# EAGLE board PCB Telemetria 2020 (EAGLE 9.6.2)
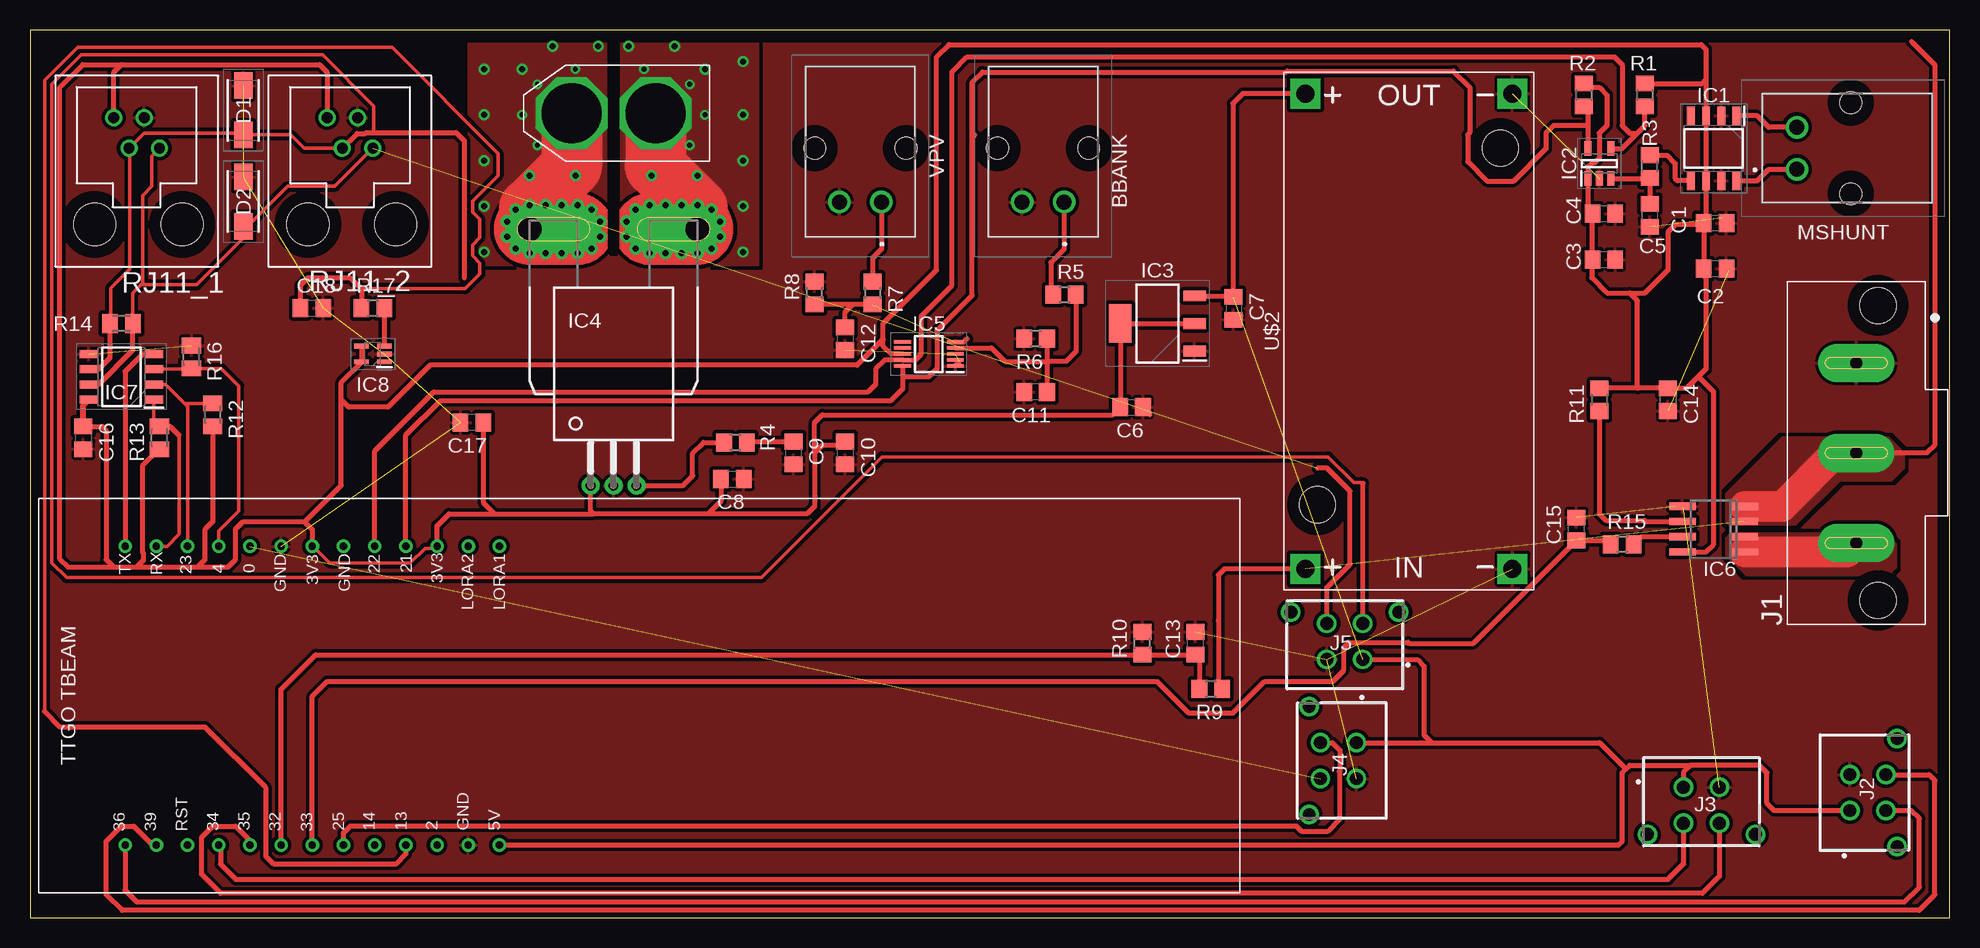
[diagram p0: board, top side]
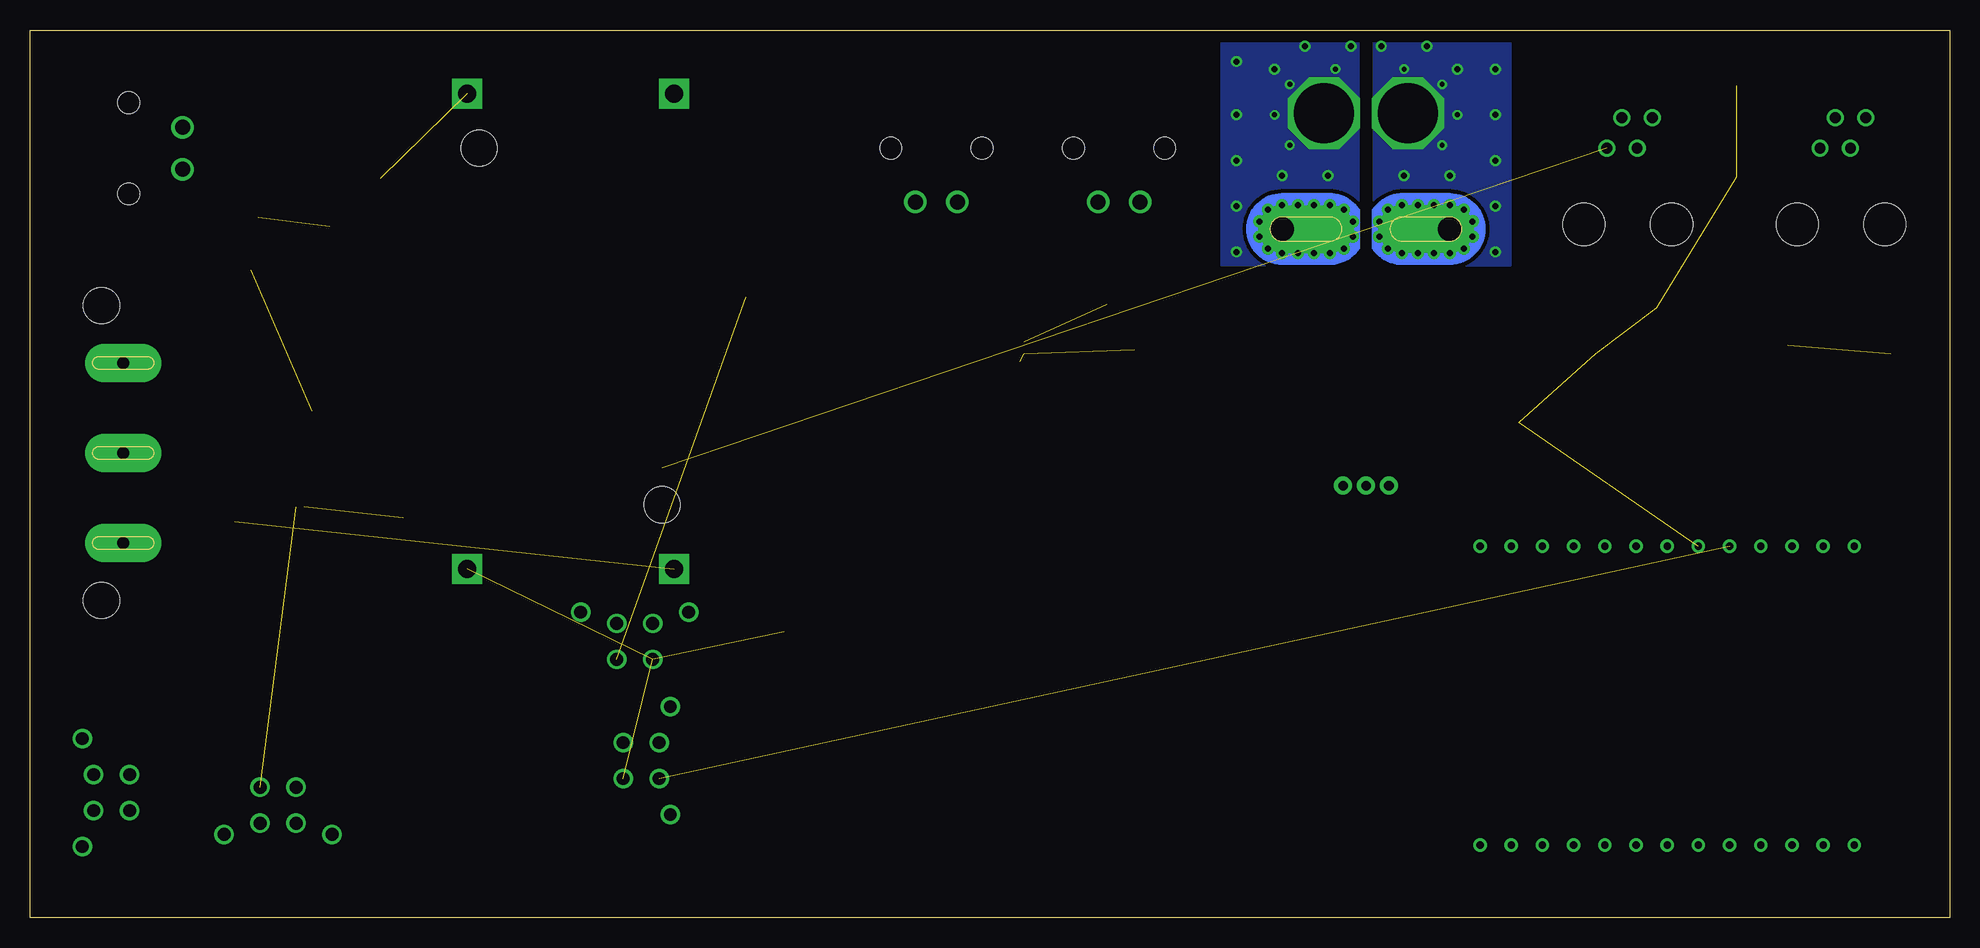
[diagram p1: board, bottom side, seen from below]

Size 160 x 74 mm. Coordinates in mm from the lower left corner, seen from the top.
Outline: 0,0 160,0 160,74 0,74 0,0
Copper layers (1*16): Top 0.07mm / dielectric 1.5mm / Bottom 0.07mm
Design rules "default *": minimum track width 12mil, minimum drill 0.35mm, track to track 12mil, track to pad 16mil, pad to pad 5mil, via to via 16mil, smd to smd 6mil, copper to edge 40mil, drill to drill 6mil, minimum pad ring 10mil, minimum via ring 8mil, stop-mask expansion 4mil, vias tented up to drill 0mil, thermal gap 10mil

## Footprints (pad centres in the part's own frame; a part is rotated, then mirrored left to right if it is on the bottom)
0532590229 = drill 1.25 pad 1.875: 1 -1.75,3.85; 2 1.75,3.85 | hole 1.8: 3.8,-0.65; -3.8,-0.65
C0805 = smd 1.3 x 1.5: 1 -0.95,0; 2 0.95,0
DIONM5026X229N = smd 2.2 x 1.55: 1 -2.05,0; 2 2.05,0
SOIC127P600X175-8N = smd 1.528 x 0.65: 1 -2.711,1.905; 2 -2.711,0.635; 3 -2.711,-0.635; 4 -2.711,-1.905; 5 2.711,-1.905; 6 2.711,-0.635; 7 2.711,0.635; 8 2.711,1.905
SOT95P280X145-5N = smd 1.2 x 0.6: 1 -1.25,0.95; 2 -1.25,0; 3 -1.25,-0.95; 4 1.25,-0.95; 5 1.25,0.95
SOT230P700X170-4N = smd 1.85 x 0.9: 1 -3.1,2.3; 2 -3.1,0; 3 -3.1,-2.3 | smd 1.85 x 3.2: 4 3.1,0
CB-PFF = drill 0.8 pad 1.5: 1 -1.91,-21.4; 2 0,-21.4; 3 1.91,-21.4 | drill 2 pad 4 offset: IP+ 7,0; IP- -7,0 | drill 0.5 pad 0.9: IP+@2 8.89,0.635; IP+@3 8.89,-0.635; IP+@4 8.175,-1.625; IP+@5 7,-2; IP+@6 5.675,-2; IP+@7 4.35,-2; IP+@8 3,-2; IP+@9 1.825,-1.625; IP+@10 1.1,-0.625; IP+@11 1.1,0.625; IP+@12 1.825,1.625; IP+@13 3,2; IP+@14 4.35,2; IP+@15 5.675,2; IP+@16 7,2; IP+@17 8.175,1.625; IP-@2 -8.89,0.635; IP-@3 -8.89,-0.635; IP-@4 -8.175,-1.625; IP-@5 -7,-2; IP-@6 -5.675,-2; IP-@7 -4.325,-2; IP-@8 -3,-2; IP-@9 -1.825,-1.625; IP-@10 -1.1,-0.625; IP-@11 -1.1,0.625; IP-@12 -1.825,1.625; IP-@13 -3,2; IP-@14 -4.325,2; IP-@15 -5.675,2; IP-@16 -7,2; IP-@17 -8.175,1.625
SOP50P490X110-10N = smd 1.4 x 0.3: 1 -2.2,1; 2 -2.2,0.5; 3 -2.2,0; 4 -2.2,-0.5; 5 -2.2,-1; 6 2.2,-1; 7 2.2,-0.5; 8 2.2,0; 9 2.2,0.5; 10 2.2,1
SOIC8 = smd 0.6 x 2.2: 1 -1.905,-2.6; 2 -0.635,-2.6; 3 0.635,-2.6; 4 1.905,-2.6; 5 1.905,2.6; 6 0.635,2.6; 7 -0.635,2.6; 8 -1.905,2.6
SOT65P210X110-5N = smd 1.2 x 0.4: 1 -0.95,0.65; 2 -0.95,0; 3 -0.95,-0.65; 4 0.95,-0.65; 5 0.95,0.65
MOLEX_172042-0406 = drill 1 pad 3.2 long: 1 7.508,2.075; 2 0,2.075; 3 -7.508,2.075 | hole 3: 12.298,0.27; -12.298,0.27
43045-0412 = drill 1.07 pad 1.62: 1 6.325,2.47; 2 3.325,2.47; 3 6.325,5.47; 4 3.325,5.47; 5 0.325,6.41; 6 9.325,6.41
R0805 = smd 1.3 x 1.5: 1 -0.95,0; 2 0.95,0
M0805 = smd 1.3 x 1.6: 1 -0.95,0; 2 0.95,0
TFC44 = drill 0.9: P$1 -1.905,4.45; P$2 -0.635,1.905; P$3 0.635,4.45; P$4 1.905,1.905 | hole 3.5: -3.5,-4.445; 3.8,-4.445
TTGOBEAM = drill 0.6: 0 11.9,5.8; 2 -13,-9.8; 3.3V 11.9,-9.8; 3V3 11.9,0.6; 4 11.9,8.4; 5V -13,-15; 13 -13,-7.2; 14 -13,-4.6; 21 11.9,-7.2; 22 11.9,-4.6; 23 11.9,11; 25 -13,-2; 32 -13,3.2; 33 -13,0.6; 34 -13,8.4; 35 -13,5.8; 36 -13,16.2; 39 -13,13.6; GND -13,-12.4; GND1 11.9,-2; GND3 11.9,3.2; LORA1 11.9,-15; LORA2 11.9,-12.4; RST -13,11; RX 11.9,13.6; TX 11.9,16.2
DC-DC-STEP-DOWN-LM2596 = drill 1.5 pad 2.5 square: IN+ -19.812,8.636; IN- -19.812,-8.636; OUT+ 19.812,8.636; OUT- 19.812,-8.636 | hole 3: -14.478,7.62; 15.24,-7.62
XT60 = drill 5 octagon: + 4.5,0; - 11.5,0

## Placement (x,y rotation side)
BBANK  53259-0229  [0532590229]  84.45,63.5 180 top
C1  100nF  [C0805]  140.46,57.91 0 top
C2  10nF  [C0805]  140.46,54.1 0 top
C3  10uF  [C0805]  131.19,54.86 0 top
C4  100nF  [C0805]  131.19,58.67 0 top
C5  100nF  [C0805]  135,58.55 270 top
C6  22uF  [C0805]  91.82,42.55 0 top
C7  22uF  [C0805]  100.33,50.8 270 top
C8  100nF  [C0805]  58.55,36.58 0 top
C9  100nF  [C0805]  63.63,38.73 270 top
C10  100nF  [C0805]  67.94,38.73 270 top
C11  1nF  [C0805]  83.82,43.81 180 top
C12  [C0805]  67.94,48.26 270 top
C13  1nF  [C0805]  97.16,22.86 90 top
C14  100nF  [C0805]  136.53,43.18 270 top
C15  100nF  [C0805]  128.91,32.38 90 top
C16  100nF  [C0805]  4.45,40.01 270 top
C17  100nF  [C0805]  36.83,41.27 180 top
C18  680pF  [C0805]  23.5,50.8 0 top
D1  SMAJ30CA  [DIONM5026X229N]  17.78,67.31 90 top
D2  SMAJ30CA  [DIONM5026X229N]  17.78,59.69 90 top
IC1  INA240A1DR  [SOIC127P600X175-8N]  140.34,64.14 270 top
IC2  MCP3221A6T-E_OTVAO  [SOT95P280X145-5N]  130.81,62.87 90 top
IC3  AZ1117IH-3.3TRG1  [SOT230P700X170-4N]  93.98,49.53 180 top
IC4  ACS758LCB-050B-PFF-T  [CB-PFF]  48.64,57.4 0 top
IC5  ADS1115IDGSR  [SOP50P490X110-10N]  74.93,46.99 180 top
IC6  ACS712-030B3  [SOIC8]  140.34,32.38 90 top
IC7  THVD2410DR  [SOIC127P600X175-8N]  7.62,45.09 180 top
IC8  TMP235AEDCKRQ1  [SOT65P210X110-5N]  28.57,46.99 180 top
J1  172042-0406  [MOLEX_172042-0406]  154.31,38.73 90 top
J2  43045-0412  [43045-0412]  149.22,15.24 270 top
J3  43045-0412  [43045-0412]  144.15,13.34 180 top
J4  43045-0412  [43045-0412]  113.03,8.26 90 top
J5  43045-0412  [43045-0412]  104.78,19.05 0 top
MSHUNT  53259-0229  [0532590229]  151.13,64.14 90 top
R1  [R0805]  134.62,68.58 90 top
R2  [R0805]  129.54,68.58 90 top
R3  680R  [R0805]  135,62.61 90 top
R4  4.7k  [R0805]  58.8,39.62 0 top
R5  220k  [R0805]  86.23,51.94 0 top
R6  13.3k  [R0805]  83.82,48.26 180 top
R7  [R0805]  70.23,52.07 270 top
R8  [R0805]  65.41,52.07 90 top
R9  16k  [R0805]  98.42,19.05 180 top
R10  4.7k  [R0805]  92.71,22.86 90 top
R11  4.7k  [R0805]  130.81,43.18 270 top
R12  10k  [M0805]  15.24,41.91 270 top
R13  10k  [M0805]  10.79,40.01 270 top
R14  120R  [M0805]  7.62,49.53 0 top
R15  1.6k  [R0805]  132.72,31.11 180 top
R16  10k  [M0805]  13.46,46.74 270 top
R17  4.7k  [R0805]  28.57,50.8 180 top
RJ11_1  TFC44  [TFC44]  8.89,62.23 0 top
RJ11_2  TFC44  [TFC44]  26.67,62.23 0 top
U$1  TTGOBEAM  [TTGOBEAM]  24.13,19.05 90 top
U$2  DC-DC-STEP-DOWN-LM2596  [DC-DC-STEP-DOWN-LM2596]  114.94,48.9 90 top
U$3  XT60  [XT60]  56.64,67.06 180 top
VPV  53259-0229  [0532590229]  69.22,63.5 180 top

## Library data of the parts
BBANK MSHUNT VPV = CON_MOLEX_53259-0229; DESCRIPTION: Headers & Wire Housings 3.5 WtB Wafer Assy R B Wafer Assy RA 2Ckt; HEIGHT: 7mm; MANUFACTURER_NAME: Molex; MANUFACTURER_PART_NUMBER: 53259-0229; MOUSER_PART_NUMBER: 538-53259-0229; MOUSER_PRICE-STOCK: https://www.mouser.co.uk/ProductDetail/Molex/53259-0229?qs=%2Fy5FSpUmAiGN4PmFvaThpA%3D%3D
C1-C18 = rcl; SPICEPREFIX: C
D1 D2 = SamacSys_Parts; DESCRIPTION: Littelfuse SMAJ30CA, Bi-Directional TVS Diode, 400W, 2-Pin DO-214AC; HEIGHT: 2.29mm; MANUFACTURER_NAME: LITTELFUSE; MANUFACTURER_PART_NUMBER: SMAJ30CA; MOUSER_PART_NUMBER: 576-SMAJ30CA; MOUSER_PRICE-STOCK: https://www.mouser.co.uk/ProductDetail/Littelfuse/SMAJ30CA?qs=HR2RnyOI4E7JQai5qAA1IA%3D%3D
IC1 = INA240A1DR; DESCRIPTION: 80V, Low-/High-Side, Bi-Directional, Zero-Drift, Current Sense Amp w/Enhanced PWM Rejection; HEIGHT: 1.75mm; MANUFACTURER_NAME: Texas Instruments; MANUFACTURER_PART_NUMBER: INA240A1DR; MOUSER_PART_NUMBER: 595-INA240A1DR; MOUSER_PRICE-STOCK: https://www.mouser.co.uk/ProductDetail/Texas-Instruments/INA240A1DR?qs=AQlKX63v8Rv7XB07RTzuHA%3D%3D
IC2 = MCP3221A6T-E_OTVAO; DESCRIPTION: Analog to Digital Converters - ADC Automotive, 12-bit SAR ADC, I2C, single channel; HEIGHT: 1.45mm; MANUFACTURER_NAME: Microchip; MANUFACTURER_PART_NUMBER: MCP3221A6T-E/OTVAO; MOUSER_PART_NUMBER: 579-MCP3221A6TEOTVAO; MOUSER_PRICE-STOCK: https://www.mouser.co.uk/ProductDetail/Microchip-Technology/MCP3221A6T-E-OTVAO?qs=5aG0NVq1C4xIe7K3D%2FHE6g%3D%3D
IC3 = AZ1117IH-3.3TRG1; DESCRIPTION: LDO Voltage Regulators LDO BJT HiCurr 1.35A 10Hz to 10KHz; HEIGHT: 1.7mm; MANUFACTURER_NAME: Diodes Inc.; MANUFACTURER_PART_NUMBER: AZ1117IH-3.3TRG1; MOUSER_PART_NUMBER: 621-AZ1117IH-3.3TRG1; MOUSER_PRICE-STOCK: https://www.mouser.co.uk/ProductDetail/Diodes-Incorporated/AZ1117IH-33TRG1?qs=cpo3%2FpBou2jnS4SxLgAVoA%3D%3D
IC4 = allegro; MPN: ACS758LCB-050B-PFF-T; OC_FARNELL: 1718997; OC_NEWARK: 04R7131
IC5 = SamacSys_Parts; DESCRIPTION: 16-Bit 860SPS 4-Ch Delta-Sigma ADC With PGA, Oscillator, Vref, Comparator, and I2C; HEIGHT: 1.1mm; MANUFACTURER_NAME: Texas Instruments; MANUFACTURER_PART_NUMBER: ADS1115IDGSR; MOUSER_PART_NUMBER: 595-ADS1115IDGSR; MOUSER_PRICE-STOCK: https://www.mouser.co.uk/ProductDetail/Texas-Instruments/ADS1115IDGSR?qs=IK5e5L0zOXjKCJoVMhYO%2FQ%3D%3D
IC6 = allegro-2
IC7 = SamacSys_Parts; DESCRIPTION: RS-485 Interface IC; HEIGHT: 1.75mm; MANUFACTURER_NAME: Texas Instruments; MANUFACTURER_PART_NUMBER: THVD2410DR; MOUSER_PART_NUMBER: 595-THVD2410DR; MOUSER_PRICE-STOCK: https://www.mouser.co.uk/ProductDetail/Texas-Instruments/THVD2410DR?qs=%252B6g0mu59x7L2L8jrQVCEYQ%3D%3D
IC8 = SamacSys_Parts; DESCRIPTION: Board Mount Temperature Sensors Automotive grade, +/-0.5C analog output temperature sensor with 10 mV/C gain 5-SC70 -40 to 150; HEIGHT: 1.1mm; MANUFACTURER_NAME: Texas Instruments; MANUFACTURER_PART_NUMBER: TMP235AEDCKRQ1; MOUSER_PART_NUMBER: 595-TMP235AEDCKRQ1; MOUSER_PRICE-STOCK: https://www.mouser.co.uk/ProductDetail/Texas-Instruments/TMP235AEDCKRQ1?qs=T3oQrply3y86j8c6PmMwyA%3D%3D
J1 = 172042-0302; AVAILABILITY: Warning; DESCRIPTION: 3 Position Header, Male Blades Connector Solder 0.295 (7.50mm) Through Hole; MF: Molex; MP: 172042-0302; PACKAGE: None; PRICE: None
J2-J5 = SamacSys_Parts; DESCRIPTION: Headers & Wire Housings 4 CKT VERT HEADER; HEIGHT: mm; MANUFACTURER_NAME: Molex; MANUFACTURER_PART_NUMBER: 43045-0412; MOUSER_PART_NUMBER: 538-43045-0412; MOUSER_PRICE-STOCK: https://www.mouser.co.uk/ProductDetail/Molex/43045-0412?qs=UeCeOHRHQebPBbEMDLocEw%3D%3D
R1-R17 = rcl; SPICEPREFIX: R
RJ11_1 RJ11_2 = Painel-Facilidades
U$1 = bibliotecattgo
U$2 = diy-modules
U$3 = XT60

## Nets
12V_CM: C15.1 R15.2 U$1.33
12V_CURRENT_M: IC6.1 IC6.2 J1.3
12V_VM: C13.1 R9.2 R10.1 U$1.32
!RXEN: IC7.2 R12.1 U$1.23
AIN2: IC5.6
AIN3: IC5.7
BBANK_AIN0: C11.1 IC5.4 R5.2 R6.1
CMPPT_F: C9.1 R4.2
CMPPT_M: IC4.IP- IC4.IP-@2 IC4.IP-@3 IC4.IP-@4 IC4.IP-@5 IC4.IP-@6 IC4.IP-@7 IC4.IP-@8 IC4.IP-@9 IC4.IP-@10 IC4.IP-@11 IC4.IP-@12 IC4.IP-@13 IC4.IP-@14 IC4.IP-@15 IC4.IP-@16 IC4.IP-@17 U$3.-
CMPPT_OUT: IC4.3 R4.1
CMPPT_P: IC4.IP+ IC4.IP+@2 IC4.IP+@3 IC4.IP+@4 IC4.IP+@5 IC4.IP+@6 IC4.IP+@7 IC4.IP+@8 IC4.IP+@9 IC4.IP+@10 IC4.IP+@11 IC4.IP+@12 IC4.IP+@13 IC4.IP+@14 IC4.IP+@15 IC4.IP+@16 IC4.IP+@17 U$3.+
CONEX_11: J2.3 U$1.36
CONEX_12: J2.4 U$1.39
CONEX_21: J3.3 U$1.34
CONEX_22: J3.4 U$1.35
CONEX_31: J4.3 U$1.25
CONEX_32: J4.4 U$1.0
GND: BBANK.2 C1.2 C2.2 C3.2 C4.2 C5.2 C6.2 C7.2 C8.2 C9.2 C10.2 C11.2 C12.2 C13.2 C14.2 C15.2 C16.2 C17.2 C18.2 D1.2 D2.2 IC1.2 IC1.7 IC2.2 IC3.1 IC4.2 IC5.1 IC5.3 IC6.5 IC7.5 IC8.2 J1.1 J2.2 J3.2 J4.2 J5.2 R6.2 R8.2 R10.2 R16.1 RJ11_1.P$3 RJ11_2.P$3 U$1.GND U$1.GND3 U$2.IN- U$2.OUT- VPV.2
I2C_SCL: IC2.5 IC5.10 R2.1 U$1.21
I2C_SDA: IC2.4 IC5.9 R1.1 U$1.22
MSHUNT_ADC: C5.1 IC2.3 R3.1
MSHUNT_AMP: IC1.5 R3.2
MSHUNT_B: IC1.8 MSHUNT.1
MSHUNT_M: IC1.1 MSHUNT.2
N$1: IC6.6 R11.2
N$2: IC6.7 R15.1
N$3: IC8.3 R17.1
N$4: U$1.14
N$13: U$1.2
N$23: U$1.GND1
N$27: U$1.LORA2
N$28: U$1.LORA1
PV_AIN1: C12.1 IC5.5 R7.2 R8.1
RS485_A: D1.1 IC7.6 J5.3 R14.1 RJ11_1.P$2 RJ11_2.P$2
RS485_B: D2.1 IC7.7 J5.4 R14.2 RJ11_1.P$4 RJ11_2.P$4
RST: U$1.RST
TEMP1: C18.1 R17.2 U$1.13
TXEN: IC7.3 R16.2 U$1.4
UART_RX: IC7.1 R13.1 U$1.RX
UART_TX: IC7.4 U$1.TX
VCC_3V3: C1.1 C2.1 C3.1 C4.1 C6.1 C8.1 C10.1 C14.1 C16.1 C17.1 IC1.3 IC1.6 IC2.1 IC3.2 IC3.4 IC4.1 IC5.8 IC6.8 IC7.8 IC8.4 R1.2 R2.2 R11.1 R12.2 R13.2 RJ11_1.P$1 RJ11_2.P$1 U$1.3.3V U$1.3V3
VCC_5V: C7.1 IC3.3 J2.1 J3.1 J4.1 J5.1 U$1.5V U$2.OUT+
VCC_12V: IC6.3 IC6.4 J1.2 R9.1 U$2.IN+
VCC_BBANK: BBANK.1 R5.1
VCC_PV: R7.1 VPV.1

## Tracks (layer width: path | path; a pad name or v marks a point on that pad's centre or on a via)
12V_CM
  Top 0.406: U$1.33 23.53,18.45 24.77,19.68 93.94,19.68 96.57,17.05 100.28,17.05 102.91,19.68 108.58,19.68 109.52,20.62 109.52,22.52 109.94,22.94 114.86,22.94 114.94,22.86 120.33,22.86 C15.1 131.44,31.43 R15.2
12V_CURRENT_M
  Top 0.406: IC6.2 IC6.1
  Top 2.54: J1.3 151.48,30.48 IC6.1
  pour Top (no thermals): 141.35,31.62 141.35,30.23 143,28.57 154.94,28.57 155.57,29.21 155.57,31.11 154.69,32 141.73,32
12V_VM
  Top 0.406: R9.2 97.47,21.59 C13.1 R10.1 23.82,21.91 20.93,19.02 U$1.32
!RXEN
  Top 0.305: U$1.23 13.13,42.62 12.95,42.8 | 12.95,42.8 11.3,44.45 IC7.2 | R12.1 13.02,42.86 12.95,42.8
BBANK_AIN0
  Top 0.406: R6.1 84.77,46.35 | 84.77,46.35 C11.1 | R5.2 87.18,47.18 86.36,46.35 84.77,46.35 | IC5.4 80.14,47.49 81.28,46.35 84.77,46.35
CMPPT_F
  Top 0.406: R4.2 59.81,39.69 C9.1
CMPPT_M  (via drill 0.4 pad 0.55, 0.5 pad 0.75)
  Top 5.08: IC4.IP- 41.64,59.11 45.14,62.61 U$3.-
  other vias: 37.85,55.5 37.85,59.31 37.85,63.12 37.85,66.93 37.85,70.74 41.66,61.85 45.47,61.85 41.02,70.74 43.56,72.64 47.37,72.64 45.47,70.74 42.29,69.47 41.02,66.93 42.29,64.39
  pour Top (no thermals): 36.58,54.36 36.58,73.53 48.01,73.53 48.01,54.36
  pour Bottom (no thermals): 36.58,54.36 36.58,73.53 48.01,73.53 48.01,54.36
CMPPT_OUT
  Top 0.406: IC4.3 54.42,36 55.24,36.83 55.24,38.73 56.13,39.62 R4.1
CMPPT_P  (via drill 0.4 pad 0.55, 0.5 pad 0.75)
  Top 5.08: U$3.+ 52.14,62.61 55.64,59.11 IC4.IP+
  other vias: 51.82,61.85 59.44,55.5 59.44,59.31 59.44,63.12 55.63,61.85 59.44,66.93 59.44,71.37 56.26,70.74 53.72,72.64 49.91,72.64 54.99,64.39 56.26,66.93 54.99,69.47 51.18,70.74
  pour Top (no thermals): 60.71,73.53 60.71,54.36 49.28,54.36 49.28,73.53
  pour Bottom (no thermals): 49.28,73.53 49.28,54.36 60.71,54.36 60.71,73.53
CONEX_11
  Top 0.406: U$1.36 7.93,2.25 8.89,1.29 156.24,1.29 157.48,2.54 157.48,8.26 156.82,8.91 J2.3
CONEX_12
  Top 0.406: J2.4 158.3,11.91 158.78,11.43 158.78,1.91 157.46,0.58 7.67,0.58 6.35,1.91 6.35,6.35 7.62,7.62 8.62,7.62 10.2,6.05 U$1.39
CONEX_21
  Top 0.406: U$1.34 15.88,5.91 15.88,4.45 17.14,3.17 136.53,3.17 137.82,4.47 J3.3
CONEX_22
  Top 0.406: J3.4 140.82,3.42 139.41,2.01 15.88,2.01 14.29,3.59 14.29,6.67 15.24,7.62 17.14,7.62 18.33,6.43 U$1.35
CONEX_31
  Top 0.406: U$1.25 26.13,7.08 26.67,7.62 105.57,7.62 106.03,7.16 108.12,7.16 109.14,8.18 109.14,12.17 109.19,12.22 109.19,13.94 108.55,14.58 J4.3
CONEX_32  (1 unrouted)
GND  (16 unrouted)
  Top 0.305: IC6.5 137.16,34.29
  Top 0.406: 140.97,58.35 C1.2 | C2.2 141.54,53.98 141.6,53.98 | 100.97,50.16 100.64,50.16 C7.2 | IC6.5 137.79,34.23 | IC5.1 77.13,46.02 77.47,46.35 | 93.34,41.91 93.34,41.97 C6.2
  pour Top (rank 2): 0,74.3 0,0 160.66,0 160.66,74.3
I2C_SCL
  Top 0.406: U$1.21 31.33,40.22 34.21,43.1 71.75,43.1 72.73,44.08 72.73,45.09 | IC5.10 72.73,45.09 | 72.73,45.09 74.93,45.09 75.64,45.8 75.64,48.82 75.56,48.9 78.54,51.87 78.54,65.03 | 78.54,65.03 78.74,65.23 | 78.54,65.03 78.54,69.65 79.38,70.48 104.72,70.48 104.8,70.57 118.66,70.57 120.02,69.22 120.02,65.44 119.84,65.26 119.84,63.01 121.43,61.42 123.68,61.42 126.36,64.1 126.36,65.41 127,66.04 129.86,66.04 | 129.84,64.14 IC2.5 129.86,66.04 | R2.1 129.86,67.31 129.86,66.04
I2C_SDA
  Top 0.406: U$1.22 28.73,38.89 33.66,43.81 69.85,43.81 70.48,44.45 70.48,45.72 71.25,46.49 IC5.9 73.8,46.49 74.3,46.99 74.3,50.16 76.83,52.7 76.83,70.48 78.11,71.75 132.08,71.75 132.72,71.12 132.72,66.04 133.35,65.41 133.99,65.41 | IC2.4 132.69,64.11 133.99,65.41 | R1.1 134.62,66.04 133.99,65.41
MSHUNT_ADC
  Top 0.406: C5.1 R3.1 134.96,61.62 IC2.3
MSHUNT_AMP
  Top 0.406: R3.2 136.46,63.56 137.16,62.87 137.16,61.59 137.33,61.42 IC1.5
MSHUNT_B
  Top 0.406: IC1.8 143.97,61.42 144.94,62.38 MSHUNT.1
MSHUNT_M
  Top 0.406: MSHUNT.2 144.94,65.89 143.97,66.85 IC1.1
N$1
  Top 0.305: IC6.6 137.47,32.92 137.16,32.92 137.16,33.02
  Top 0.406: R11.2 130.81,33.66 131.35,33.11 134.57,33.11 134.66,33.02 137.16,33.02
N$2
  Top 0.406: R15.1 134.3,31.75 IC6.7
N$3
  Top 0.406: R17.1 IC8.3
PV_AIN1  (1 unrouted)
  Top 0.406: 65.41,50.8 R8.1 68.58,51.12 | 68.58,51.12 R7.2 69.94,50.83 | 68.58,51.12 67.94,50.48 C12.1 | IC5.5 77.83,47.99 78.11,48.26
RS485_A
  Top 0.305: R14.1 6.73,49.59 6.73,52.47 8.31,54.05 8.31,64.08 RJ11_1.P$2 9.53,65.41 17.64,65.41 D1.1 21.73,65.26 22.86,64.14 RJ11_2.P$2 | 28.65,65.45 28.65,67.67 24.38,71.93 4.27,71.93 1.83,69.49 1.83,29.57 3.05,28.35 60.96,28.35 71.02,38.41 108.2,38.41 110.34,36.27 110.95,36.27 111.1,36.17
  Top 0.406: IC7.6 5.71,45.72 6.67,46.67 R14.1 | RJ11_2.P$2 27.27,65.37 27.95,65.37 28.03,65.45 28.65,65.45 35.52,65.45 36.2,64.77 36.2,53.34 | J5.3 111.1,36.17 111.12,36.2
RS485_B  (1 unrouted)
  Top 0.305: RJ11_1.P$4 10.16,63.5 10.16,60.96 9.4,60.2 9.4,52.9 9.27,52.77 | RJ11_2.P$4 25.4,60.96 21.48,60.96 18.16,57.64 D2.1 17.78,56.64 13.91,52.77 9.27,52.77 | 9.27,52.77 8.57,52.07 R14.2
  Top 0.406: IC7.7 5.71,44.45 8.57,47.3 R14.2 | J5.4 108.1,27.52 110.03,29.46 110.03,35.54 108.11,37.47 107.31,37.47
TEMP1
  Top 0.305: 1.22,17.2 1.22,69.8 3.96,72.54 30.18,72.54 39.01,63.7 39.01,61.87 36.88,59.74 36.88,58.83 37.49,58.22 37.49,56.69 36.88,56.08 36.88,55.17 37.49,54.56 37.49,53.65 36.27,52.43 27.74,52.43 27.62,52.38
  Top 0.406: U$1.13 31.33,5.29 30.48,4.45 20.32,4.45 19.68,5.08 19.68,10.79 14.61,15.88 2.54,15.88 1.22,17.2 | C18.1 22.55,52.7 23.18,53.34 26.67,53.34 27.62,52.38 R17.2
TXEN
  Top 0.305: U$1.4 15.73,32.24 17.4,33.91 17.4,44.32 15.94,45.79 R16.2 13.4,45.72 IC7.3
UART_RX
  Top 0.305: 12.44,40.2 12.44,31.97 11.42,30.95 U$1.RX | IC7.1 10.33,41.42 R13.1
  Top 0.406: R13.1 11.68,40.95 12.44,40.2
UART_TX
  Top 0.305: IC7.4 9.4,46.99
  Top 0.406: U$1.TX 7.93,45.52 9.4,46.99
VCC_3V3
  Top 0.305: U$1.3.3V 33.83,30.79 32.92,30.79 31.7,29.57 24.99,29.57 23.77,30.79 U$1.3V3
  Top 0.406: 139.51,57.78 C1.1 139.38,57.78 137.16,57.78 136.53,57.15 136.53,53.98 134.62,52.07 133.35,52.07 | 139.51,57.78 C2.1 | 139.51,57.78 139.7,57.97 IC1.6 IC1.3 139.7,69.85 | 133.35,52.07 131.44,52.07 130.18,53.34 130.18,54.61 130.24,54.68 C3.1 C4.1 129.86,59.05 IC2.1 129.86,62.55 130.22,62.91 130.41,62.91 130.81,63.3 130.81,65.41 131.44,66.04 131.44,68.58 130.81,69.22 129.85,69.22 R2.2 | IC3.2 IC3.4 C6.1 90.24,41.91 66.04,41.91 65.41,41.27 65.41,38.73 | C8.1 57.6,34.74 56.52,33.66 | 56.52,33.66 46.99,33.66 | 46.99,33.66 46.73,33.91 IC4.1 | 65.41,38.73 66.04,39.37 67.63,39.37 C10.1 | 56.52,33.66 64.77,33.66 65.41,34.29 65.41,38.73 | RJ11_1.P$1 6.99,70.48 7.62,71.12 | 7.62,71.12 24.13,71.12 24.77,70.48 RJ11_2.P$1 | C17.1 37.78,34.61 38.73,33.66 | 38.73,33.66 46.99,33.66 | U$1.3.3V 33.93,32.66 34.92,33.66 38.73,33.66 | C16.1 6.04,40.95 6.35,40.64 6.35,29.84 6.99,29.21 | 6.99,29.21 8.89,29.21 | 8.89,29.21 13.97,29.21 | 13.97,29.21 16.51,29.21 17.14,29.84 17.14,32.38 17.78,33.02 22.86,33.02 22.89,32.98 | 22.89,32.98 23.53,32.35 U$1.3V3 | R13.2 9.37,37.63 9.37,30.47 9.44,30.39 9.44,29.76 8.89,29.21 | R12.2 15.24,33.02 14.57,32.35 14.57,30.47 | 14.57,30.47 14.58,30.45 | 6.99,29.21 3.17,29.21 2.49,29.9 2.49,69.22 4.39,71.12 7.62,71.12 | C2.1 139.51,53.53 139.7,53.34 | C2.1 139.7,53.91 139.7,45.72 139.06,45.09 | 139.06,45.09 138.11,44.13 C14.1 133.99,44.13 | IC6.8 139.7,30.48 140.34,31.11 140.34,43.81 139.06,45.09 | 14.57,30.47 14.57,29.81 13.97,29.21 | 133.99,44.13 R11.1 | 133.35,52.07 133.99,51.44 133.99,44.13 | 139.7,69.85 139.7,72.39 139.31,72.78 76.59,72.78 75.56,71.75 75.56,53.98 71.12,49.53 71.12,48.22
  Top 0.406: IC5.8 71.75,46.99 71.12,47.62 71.12,48.22 | R1.2 139.38,69.53 139.7,69.85 | 71.12,48.22 68.95,46.05 33.35,46.05 29.84,42.55 26.58,42.55 25.95,43.18 | 25.95,43.18 25.95,36.03 22.89,32.98 | 25.95,43.18 25.95,44.61 27.62,46.29 IC8.4
  Top 0.508: C16.1 4.45,42.72 IC7.8
VCC_5V  (1 unrouted)
  Top 0.406: J2.1 145.39,8.91 144.78,9.53 144.78,12.06 144.15,12.7 138.43,12.7 | 138.43,12.7 137.82,12.09 J3.1 | U$1.5V 132.41,6.05 132.72,6.35 132.72,12.06 133.03,12.38 | 133.03,12.38 133.35,12.7 138.43,12.7 | IC3.3 100.25,51.83 | U$2.OUT+ 101.09,68.71 100.25,67.86 100.25,51.83 | J4.1 116.84,14.58 | 116.84,14.58 130.84,14.58 133.03,12.38 | 116.84,14.58 116.2,15.21 116.2,20.95 115.64,21.52 J5.1 | C7.1 100.25,51.83
VCC_12V  (1 unrouted)
  Top 0.406: IC6.3 IC6.4 | U$2.IN+ 99.57,29.08 99.06,28.57 99.06,24.77 99.06,19.36 R9.1 | 156.84,73.03 158.75,71.12 158.75,39.37 158.12,38.73 J1.2
  Top 2.54: IC6.4 146.05,34.29 150.5,38.73 J1.2
  pour Top (no thermals): 141.6,32.77 147.19,32.77 150.88,36.45 155.19,36.45 156.21,37.47 156.21,38.73 154.94,40.01 146.05,40.01 141.35,35.31 141.35,33.02
VCC_BBANK
  Top 0.406: BBANK.1 86.2,55.73 85.09,54.61 85.09,52.14 R5.1
VCC_PV
  Top 0.406: VPV.1 70.97,55.73 70.23,54.99 R7.1